# Allegro board SSTM32_BUS_0910.brd
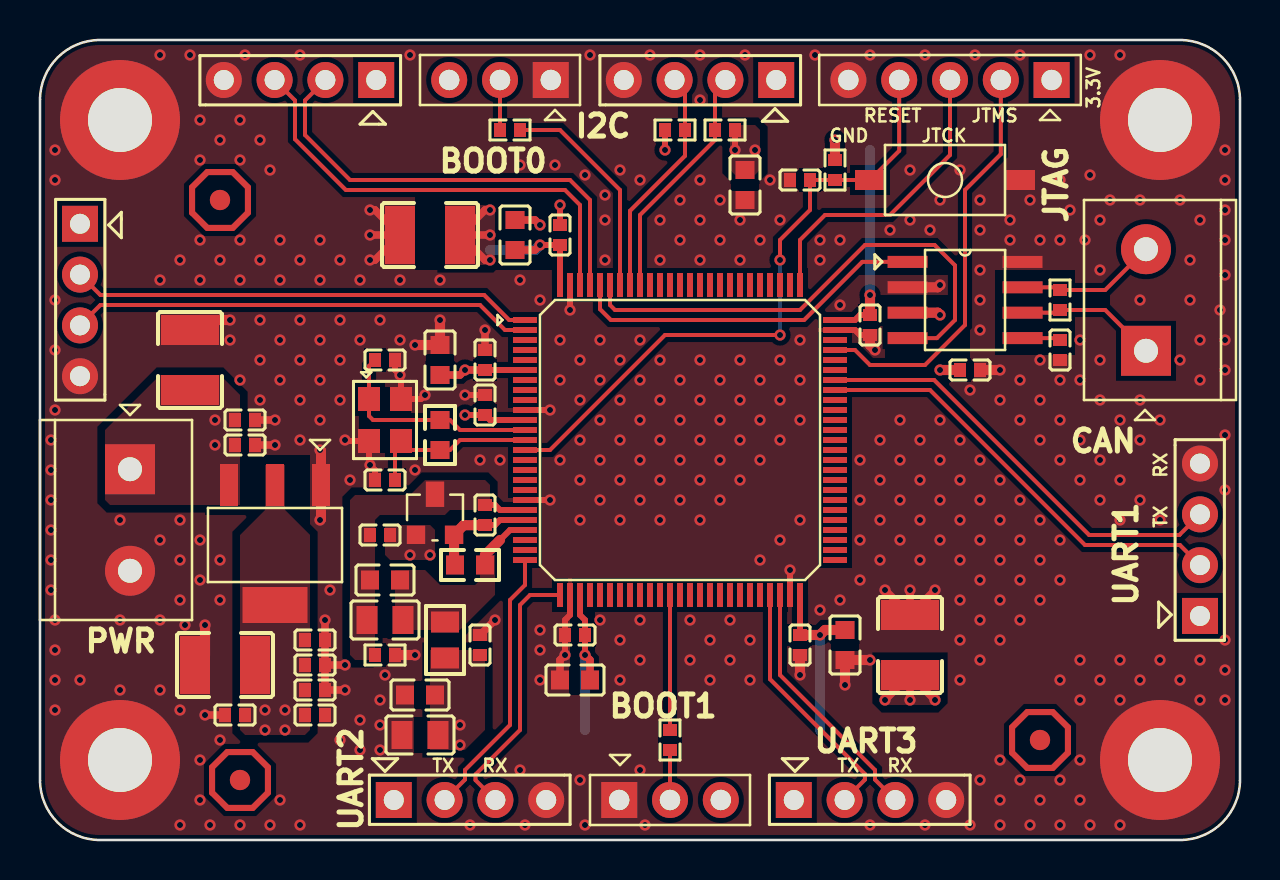
[diagram p0: board, top side]
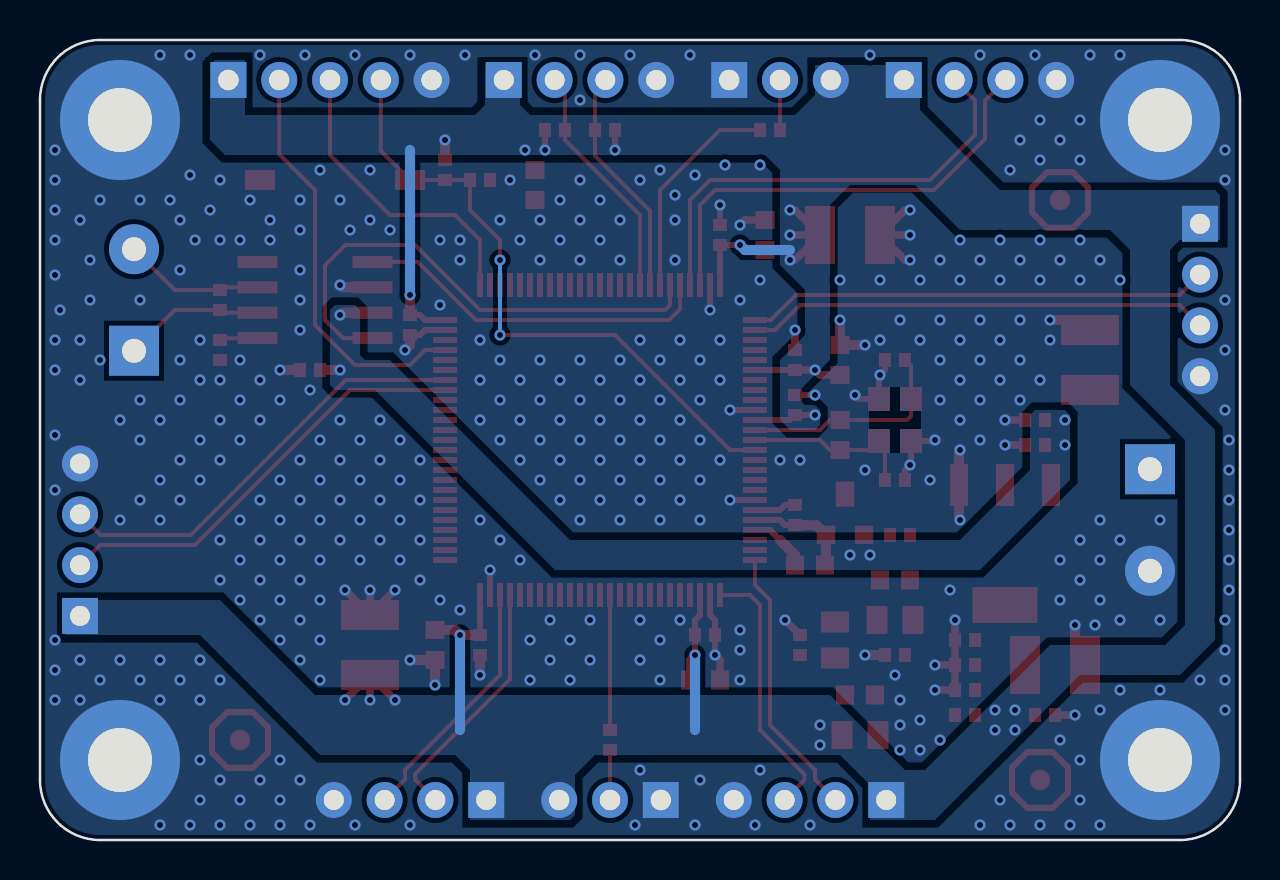
[diagram p1: board, bottom side, seen from below]

Outline 60 x 40 mm; copper layers: TOP, BOTTOM. Coordinates in mm from the lower left corner of the outline.
Outline path: 0,37 arc(0.88,39.12) 3,40 57,40 arc(59.12,39.12) 60,37 60,3 arc(59.12,0.88) 57,0 3,0 arc(0.88,0.88) 0,3 0,37

## Placement (name value [footprint] x y rotation side)
C1  20pF  [C0402]  17.25 24 0 top
C2  20pF  [C0402]  17.25 18 0 top
C10  104  [C0402]  17 15.25 0 top
C11  104  [C0402]  22.25 16.25 270 top
C12  104  [C0402]  10.25 21 0 top
C13  104  [C0402]  10.25 19.75 0 top
C14  47uF/16V  [C1210]  7.5 24 90 top
C15  104  [C0402]  13.75 10 180 top
C16  104  [C0402]  13.75 8.75 180 top
C17  104  [C0402]  13.75 7.5 180 top
C18  104  [C0402]  13.75 6.25 180 top
C19  104  [C0402]  9.75 6.25 0 top
C20  47uF/16V  [C1210]  9.25 8.75 180 top
C28  104  [C0402]  22.25 24 270 top
C29  104  [C0402]  26.75 10.25 0 top
C30  104  [C0402]  22 9.75 270 top
C31  104  [C0402]  22.25 21.75 270 top
C32  104  [C0402]  26 30.25 270 top
C33  104  [C0402]  38 9.75 90 top
C34  104  [C0402]  41.5 25.75 90 top
C35  47uF/25V  [C1210]  43.5 9.75 90 top
C36  47uF/25V  [C1210]  19.5 30.25 180 top
C46  0.1uF  [C0603]  26.75 8 0 top
C47  0.1uF  [C0603]  40.25 9.75 90 top
C48  0.1uF  [C0603]  19 7.25 0 top
C49  0.1uF  [C0603]  35.25 32.75 90 top
C50  0.1uF  [C0603]  20 24 270 top
C51  0.1uF  [C0603]  23.75 30.25 270 top
C52  10uF/25V  [C0805]  19 5.25 180 top
C53  0.1uF  [C0603]  17.25 13 0 top
C54  10uF/25V  [C0805]  17.25 11 180 top
C55  0.1uF  [C0402]  51 24.5 270 top
C56  0.1uF  [C0402]  46.5 23.5 0 top
C57  0.1uF  [C0402]  38 33 180 top
J1  Header_2p54  [CON4M2_54H11D]  2 27 270 top
J2  Header_2p54  [CON1X3_2P54]  23 38 180 top
J3  Header_2p54  [CON1X3_2P54]  31.5 2 0 top
J4  Header_2p54  [CON4M2_54H11D]  13 38 180 top
J5  HEADER 2  [CON1X2_5P08]  55.3 27 90 top
J6  HEADER 5/SM  [CON1X5_2P54]  45.5 38 180 top
J7  Header_2p54  [CON4M2_54H11D]  21.5 2 0 top
J8  Header_2p54  [CON4M2_54H11D]  58 15.01 90 top
J9  Header_2p54  [CON4M2_54H11D]  41.5 2 0 top
J10  Header_2p54  [CON4M2_54H11D]  33 38 180 top
J11  HEADER 2  [CON1X2_5P08]  4.5 16 270 top
K1  OMRON-B3U-1000P  [TS-LB16]  45.25 33 0 top
L2  10uH  [L0805]  20.25 10 90 top
M1  MountHole_3r20x6r00  [MOUNT06R00D03R20]  4 4 0 top
M2  MountHole_3r20x6r00  [MOUNT06R00D03R20]  56 4 0 top
M3  MountHole_3r20x6r00  [MOUNT06R00D03R20]  56 36 0 top
M4  MountHole_3r20x6r00  [MOUNT06R00D03R20]  4 36 0 top
NOREF  -  [unnamed]  9 32 0 top
NOREF#2  -  [unnamed]  10 3 0 top
NOREF#3  -  [unnamed]  50 5 0 top
R2  1M  [R0603]  20 20.25 270 top
R3  10K  [R0402]  39.75 33.5 270 top
R23  NC  [R0603]  21.5 13.75 180 top
R24  0  [R0402]  17.25 9.25 180 top
R25  10K  [R0402]  23.5 35.5 0 top
R26  10K  [R0402]  31.5 5 90 top
R27  4.7K  [R0402]  34.25 35.5 0 top
R28  4.7K  [R0402]  31.75 35.5 180 top
R29  120R  [R0402]  51 27 270 top
U1  stm32f103vct6  [ST_LQFP100_S]  32 20 0 top
U7  REF3020  [SOT23]  19.75 16.25 0 top
U8  LT1117-3.3  [SOT-223]  11.75 14.75 0 top
U12  TJA1050T  [PLS_SOP-8_S]  46.25 27 270 top
Y2  8.000MHz  [CRYS4_3225_S]  17.25 21 270 top

## Library data of the parts
C1 C2 C10 C11 C28-C34 C46-C51 C53 C55-C57 = CAP NP
C12 C13 C15-C19 = C0603
C14 C20 C35 C36 C52 C54 = TC5\2MM
J1 J4 J7-J10 = CON_1x4
J2 J3 = HEADER_3x1
J5 J11 = HEADER 2
J6 = HEADER 5/SM
K1 = SW_DP_MOM_0
L2 = CHOKE
M1-M4 = MountHole
R2 R3 R23-R29 = R
U1 = stm32f103vct6
U7 = AS1117_3
U8 = AS1117_0
U12 = BA6305F/SO_3
Y2 = Crystal_4pin

## Footprints (pads in the part's own frame, mm; a bottom-side part is the same pattern mirrored in y, then rotated)
C0402
  rect 0.6x0.7 smd: 1(-0.5,0) 2(0.5,0)
C0603
  rect 0.9x0.95 smd: 1(-0.75,0) 2(0.75,0)
C0805
  rect 1.05x1.4 smd: 1(-0.9,0) 2(0.9,0)
C1210
  rect 1.5x2.9 smd: 1(-1.5,0) 2(1.5,0)
CON1X2_5P08
  rect 2.5x2.5 hole 1.2: 1(-2.54,0)
  round 2.5 hole 1.2: 2(2.54,0)
CON1X3_2P54
  rect 1.8x1.8 hole 1.02: 1(-2.54,0)
  round 1.8 hole 1.02: 2(0,0) 3(2.54,0)
CON1X5_2P54
  rect 1.8x1.8 hole 1.02: 1(-5.08,0)
  round 1.8 hole 1.02: 2(-2.54,0) 3(0,0) 4(2.54,0) 5(5.08,0)
CON4M2_54H11D
  rect 1.8x1.8 hole 1: 1(-3.81,0)
  round 1.8 hole 1: 2(-1.27,0) 3(1.27,0) 4(3.81,0)
CRYS4_3225_S
  rect 1.2x1.1 smd: 1(-1.05,-0.8) 2(1.05,-0.8) 3(1.05,0.8) 4(-1.05,0.8)
L0805
  rect 1.05x1.4 smd: 1(-0.9,0) 2(0.9,0)
MOUNT06R00D03R20
  round 6 hole 3.2: 1(0,0)
PLS_SOP-8_S
  rect 0.6x2 smd: 1(-1.905,-2.875) 2(-0.635,-2.875) 3(0.635,-2.875) 4(1.905,-2.875) 5(1.905,2.875) 6(0.635,2.875) 7(-0.635,2.875) 8(-1.905,2.875)
R0402
  rect 0.6x0.7 smd: 1(-0.5,0) 2(0.5,0)
R0603
  rect 0.9x0.95 smd: 1(-0.75,0) 2(0.75,0)
SOT23
  rect 0.92x0.92 smd: 1(-0.953,-0.991) 2(0.953,-0.991)
  rect 0.92x1.27 smd: 3(0,1.041)
SOT-223
  rect 0.9x2.1 smd: 1(2.3,3) 2(0,3) 3(-2.3,3)
  rect 3.25x1.8 smd: 4(0,-3)
ST_LQFP100_S
  rect 1.2x0.3 smd: 1(-7.75,6) 2(-7.75,5.5) 3(-7.75,5) 4(-7.75,4.5) 5(-7.75,4) 6(-7.75,3.5) 7(-7.75,3) 8(-7.75,2.5) 9(-7.75,2) 10(-7.75,1.5) 11(-7.75,1) 12(-7.75,0.5) 13(-7.75,0) 14(-7.75,-0.5) 15(-7.75,-1) 16(-7.75,-1.5) 17(-7.75,-2) 18(-7.75,-2.5) 19(-7.75,-3) 20(-7.75,-3.5) 21(-7.75,-4) 22(-7.75,-4.5) 23(-7.75,-5) 24(-7.75,-5.5) 25(-7.75,-6) 51(7.75,-6) 52(7.75,-5.5) 53(7.75,-5) 54(7.75,-4.5) 55(7.75,-4) 56(7.75,-3.5) 57(7.75,-3) 58(7.75,-2.5) 59(7.75,-2) 60(7.75,-1.5) 61(7.75,-1) 62(7.75,-0.5) 63(7.75,0) 64(7.75,0.5) 65(7.75,1) 66(7.75,1.5) 67(7.75,2) 68(7.75,2.5) 69(7.75,3) 70(7.75,3.5) 71(7.75,4) 72(7.75,4.5) 73(7.75,5) 74(7.75,5.5) 75(7.75,6)
  rect 0.3x1.2 smd: 26(-6,-7.75) 27(-5.5,-7.75) 28(-5,-7.75) 29(-4.5,-7.75) 30(-4,-7.75) 31(-3.5,-7.75) 32(-3,-7.75) 33(-2.5,-7.75) 34(-2,-7.75) 35(-1.5,-7.75) 36(-1,-7.75) 37(-0.5,-7.75) 38(0,-7.75) 39(0.5,-7.75) 40(1,-7.75) 41(1.5,-7.75) 42(2,-7.75) 43(2.5,-7.75) 44(3,-7.75) 45(3.5,-7.75) 46(4,-7.75) 47(4.5,-7.75) 48(5,-7.75) 49(5.5,-7.75) 50(6,-7.75) 76(6,7.75) 77(5.5,7.75) 78(5,7.75) 79(4.5,7.75) 80(4,7.75) 81(3.5,7.75) 82(3,7.75) 83(2.5,7.75) 84(2,7.75) 85(1.5,7.75) 86(1,7.75) 87(0.5,7.75) 88(0,7.75) 89(-0.5,7.75) 90(-1,7.75) 91(-1.5,7.75) 92(-2,7.75) 93(-2.5,7.75) 94(-3,7.75) 95(-3.5,7.75) 96(-4,7.75) 97(-4.5,7.75) 98(-5,7.75) 99(-5.5,7.75) 100(-6,7.75)
TS-LB16
  rect 1.5x1 smd: 1(-3.75,0) 2(3.75,0)
unnamed
  round 1.016 smd: 1(0,0)

## Nets
GND: C1.2 C2.1 C12.2 C13.2 C14.2 C15.1 C16.1 C17.1 C18.1 C19.1 C20.2 C28.1 C29.1 C30.1 C31.1 C32.1 C33.1 C34.1 C35.2 C36.2 C46.1 C47.1 C48.1 C49.1 C50.1 C51.1 C52.2 C55.2 C56.2 C57.2 J1.4 J2.1 J3.1 J4.4 J6.5 J7.4 J8.4 J9.4 J10.4 J11.2 K1.2(A2) M1.1 M2.1 M3.1 M4.1 R24.1 U1.10(VSS_5) U1.19(VSSA) U1.27(VSS_4) U1.49(VSS_1) U1.74(VSS_2) U1.99(VSS_3) U8.1(ADJ/GND) U12.2(GND) U12.8(S) Y2.2(GND#2) Y2.4(GND#4)
VCC3V3: C15.2 C16.2 C17.2 C18.2 C19.2 C20.1 C28.2 C29.2 C30.2 C31.2 C32.2 C33.2 C34.2 C35.1 C36.1 C46.2 C47.2 C48.2 C49.2 C50.2 C51.2 C52.1 J1.1 J2.3 J3.3 J4.1 J6.1 J7.1 J8.1 J9.1 J10.1 L2.1 R3.1 R27.2 R28.2 U1.6(VBAT) U1.11(VDD_5) U1.28(VDD_4) U1.50(VDD_1) U1.75(VDD_2) U1.100(VDD_3) U8.2(VOUT) U8.4(OUT)
VCC5V: C10.2 C12.1 C13.1 C14.1 C56.1 J11.1 U7.1(VIN) U8.3(VIN) U12.3(VCC)
VDDA: C53.2 C54.1 L2.2 R23.1 U1.22(VDDA)
BOOT0: R25.2 U1.94(BOOT0)
BOOT1: R26.2 U1.37(PB2/BOOT2)
CAN_RX: U1.95(PB8) U12.4(RXD)
CAN_TX: U1.96(PB9) U12.1(TXD)
I2C_SCL: J10.2 R27.1 U1.92(PB6)
I2C_SDA: J10.3 R28.1 U1.93(PB7)
JTCK: J6.3 U1.76(PA14)
JTMS: J6.2 U1.72(PA13)
OSC_IN: C1.1 R2.1 U1.12(OSC_IN) Y2.1(XTAL1)
OSC_OUT: C2.2 R2.2 U1.13(OSC_OUT) Y2.3(XTAL2)
PE0: J4.2 U1.97(PE0)
PE1: J4.3 U1.98(PE1)
PE2: J1.2 U1.1(PE2)
PE3: J1.3 U1.2(PE3)
RESET_N: C57.1 J6.4 K1.1(A1) R3.2 U1.14(NRST)
UART_RX1: J8.3 U1.69(PA10)
UART_RX2: J7.3 U1.26(PA3)
UART_RX3: J9.3 U1.48(PB11)
UART_TX1: J8.2 U1.68(PA9)
UART_TX2: J7.2 U1.25(PA2)
UART_TX3: J9.2 U1.47(PB10)
VREF+: C11.2 R23.2 U1.21(VREF+) U7.2(VREF)
VREF-: C10.1 C11.1 C53.1 C54.2 R24.2 U1.20(VREF-) U7.3(GND)
N16840656: J3.2 R26.1
N16851849: J5.2 R29.1 U12.7(CANH)
N16851852: J5.1 R29.2 U12.6(CANL)
N16852460: C55.1 U12.5(VREF)
N16860628: J2.2 R25.1

Pads without a net: NOREF 1; NOREF#2 1; NOREF#3 1; U1 3 4 5 7 8 9 15 16 17 18 23 24 29 30 31 32 33 34 35 36 38 39 40 41 42 43 44 45 46 51 52 53 54 55 56 57 58 59 60 61 62 63 64 65 66 67 70 71 73 77 78 79 80 81 82 83 84 85 86 87 88 89 90 91

## Via types
v1: diameter 0.559, hole 0.305, TOP to BOTTOM, 437 vias

## Routing (per net, layer and track width the routed paths; a pad name or vN(x,y) marks a point on that pad's centre or on a via; arc(x,y) is an arc through that point)
GND: length 60.7
  TOP w0.3: C2.1 16.75,18.5 v1(16.5,18.75) 16.45,18.8 Y2.2 15.3,19.95 v1(15.25,20) ; v1(26.25,9.25) C29.1 26.25,11 26.5,11.25 U1.27 ; U1.19 v1(25.5,17) ; U1.74 40.75,25.5 41,25.25 C34.1 ; U1.49 v1(37.5,13.5) ; U1.10 v1(25.5,21.5) ; C32.1 v1(26,31.75) ; U1.99 v1(26.5,26.5) ; v1(19.25,22.25) 19.05,22.05 Y2.4 18.05,23.2 v1(18,23.25) 17.75,23.5 C1.2 ; C31.1 v1(21.25,22.25)
  TOP w0.381: v1(42.25,12.5) C35.2 ; C35.2 v1(44.75,12.5) ; C35.2 v1(43.5,12.5) ; C51.1 24.75,31 v1(25,30.75) ; C13.2 v1(11.75,19.75) ; v1(26.25,9.25) 26,9 C46.1 ; C36.2 16.75,29 v1(16.5,29) ; C36.2 v1(16.5,30.25) ; C36.2 16.75,31.5 v1(16.5,31.5) ; C12.2 v1(11.75,21) ; C28.1 v1(22.25,25.5) ; v1(14.25,11) C15.1 C16.1 ; C16.1 v1(15.25,8.75) ; C16.1 C17.1 v1(15.25,7.5) ; C30.1 v1(22.75,11) ; C19.1 v1(8.25,6.25)
  TOP w0.5: v1(14,16) 14.05,16.05 U8.1 14.05,19.45 v1(14,19.5)
  TOP w0.508: v1(8.25,10.75) 8.25,9.25 C20.2 ; v1(9.5,26) 8,26 C14.2 ; v1(20,26) C50.1 v1(18.75,24.75) ; C34.1 41.5,24.75 v1(41.75,24.5) ; v1(41.5,9) C47.1 v1(40.25,7.75) ; U12.2 44.88,27.64 v1(45,27.75) ; R24.1 v1(18.75,9.25) ; C33.1 v1(38,8.25) ; C56.2 v1(48,23.5)
  vias: v1(0.55,20) v1(0.55,18.5) v1(0.55,17) v1(0.55,15.5) v1(0.55,14) v1(0.55,12.5) v1(0.75,34.5) v1(0.75,33) v1(0.75,27) v1(0.75,24.5) v1(0.75,21.5) v1(0.75,11) v1(0.75,9.5) v1(0.75,8) v1(0.75,6.5) v1(2,8) v1(4,16) v1(4,11) v1(4,7.5) v1(6,39.25) v1(6,28) v1(6,15) v1(6,11) v1(6,7.5) v1(7,29) v1(7,16) v1(7,14) v1(7,12) v1(7,6.5) v1(7,0.75) v1(7.25,10.75) v1(7.5,39.25) v1(8,36) v1(8,34) v1(8,30) v1(8,28) v1(8,15) v1(8,13) v1(8,4) v1(8,2) v1(8.5,0.75) v1(9,35) v1(9,29) v1(9,14) v1(9,12) v1(9,5) v1(9.5,25) v1(10,36) v1(10,34) v1(10,30) v1(10,28) v1(10,23) v1(10,0.75) v1(10.25,39.25) v1(11,35) v1(11,29) v1(11,26) v1(11,24) v1(11,22) v1(11.5,33.5) v1(11.5,0.75) v1(12,30) v1(12,28) v1(12,25) v1(12,23) v1(12,2) v1(13,39.25) v1(13,29) v1(13,26) v1(13,24) v1(13,22) v1(13,20) v1(13,0.75) v1(14,30) v1(14,28) v1(14,25) v1(14,23) v1(14,21) v1(14.5,12.5) v1(15,29) v1(15,26) v1(15,24) v1(15,22) v1(15,5) v1(15.5,18) v1(16,28) v1(16,25) v1(16,6) v1(16,4.5) v1(17,26) v1(17,7) v1(17,5.75) v1(17,4.5) v1(17.25,8.25) v1(18,28) v1(18,25) v1(18.5,39.25) v1(18.75,18.5) v1(20,28) v1(21.5,0.75) v1(22,19) v1(23,19) v1(24,33.75) v1(24,28) v1(24,3.5) v1(24.25,0.75) v1(25,27) v1(25,10.5) v1(25,9.5) v1(25,8) v1(25.75,33.75) v1(26,25) v1(26,23) v1(26,19) v1(27,24) v1(27,22) v1(27,20) v1(27,18) v1(27,16) v1(27,3) v1(27.25,33.25) v1(27.25,0.75) v1(27.5,39.25) v1(28,25) v1(28,23) v1(28,21) v1(28,19) v1(28,17) v1(28,11) v1(28.25,32.25) v1(28.25,31) v1(28.25,29) v1(29,33.5) v1(29,24) v1(29,22) v1(29,20) v1(29,18) v1(29,16) v1(29,10) v1(29,8) v1(30,33) v1(30,25) v1(30,23) v1(30,21) v1(30,19) v1(30,17) v1(30,11) v1(30,9) v1(30,3.5) v1(30.25,0.75) v1(30.5,39.25) v1(31,31) v1(31,29) v1(31,24) v1(31,22) v1(31,20) v1(31,18) v1(31,16) v1(32,32) v1(32,30) v1(32,23) v1(32,21) v1(32,19) v1(32,17) v1(32.5,11) v1(32.5,9) v1(33,39.25) v1(33,37) v1(33,33) v1(33,31) v1(33,29) v1(33,24) v1(33,22) v1(33,20) v1(33,18) v1(33,16) v1(33.5,10) v1(33.5,8) v1(34,32) v1(34,30) v1(34,23) v1(34,21) v1(34,19) v1(34,17) v1(34.5,11) v1(34.5,9) v1(35,31) v1(35,29) v1(35,24) v1(35,22) v1(35,20) v1(35,18) v1(35.25,39.25) v1(35.5,10) v1(35.5,8) v1(36,30) v1(36,23) v1(36,21) v1(36,19) v1(36,14) v1(36.5,33) v1(37,31) v1(37,24) v1(37,22) v1(37,20) v1(37,15) v1(38,25) v1(38,23) v1(38,21) v1(38,16) v1(38.75,39.25) v1(39,30) v1(39,29) v1(39,11.5) v1(40,30) v1(40,26.75) v1(40,12) v1(41,19) v1(41,17) v1(41,15) v1(41,13) v1(41.5,39.25) v1(41.5,0.75) v1(42,20) v1(42,18) v1(42,16) v1(42,14) v1(42.5,30.5) v1(43,21) v1(43,19) v1(43,17) v1(43,15) v1(43.5,33.5) v1(43.5,31) v1(44,20) v1(44,18) v1(44,16) v1(44,14) v1(44.25,39.25) v1(44.25,0.75) v1(44.5,30.5) v1(45,32) v1(45,21) v1(45,19) v1(45,17) v1(45,15) v1(46,33.5) v1(46,20) v1(46,18) v1(46,16) v1(46,14) v1(46,12) v1(46,10) v1(46,8) v1(46.5,22.5) v1(46.5,0.75) v1(46.75,39.25) v1(47,32) v1(47,30.5) v1(47,28.5) v1(47,27) v1(47,25.5) v1(47,19) v1(47,17) v1(47,15) v1(47,13) v1(47,11) v1(47,9) v1(47,3) v1(48,22) v1(48,18) v1(48,16) v1(48,14) v1(48,12) v1(48,10) v1(48,4) v1(48,2) v1(48,0.75) v1(48.5,31) v1(48.5,30) v1(49,39.25) v1(49,23) v1(49,21) v1(49,17) v1(49,15) v1(49,13) v1(49,11) v1(49,3) v1(49.5,32) v1(49.5,0.75) v1(50,30) v1(50,24) v1(50,22) v1(50,20) v1(50,16) v1(50,14) v1(50,12) v1(50,2) v1(51,33) v1(51,30) v1(51,23) v1(51,21) v1(51,19) v1(51,15) v1(51,13) v1(51,8) v1(51,3) v1(51,0.75) v1(51.5,31.5) v1(52,25) v1(52,23) v1(52,20) v1(52,18) v1(52,9) v1(52,7) v1(52,4) v1(52,2) v1(52.25,30) v1(52.5,39.25) v1(52.5,33.25) v1(52.5,0.75) v1(53,31) v1(53,28.5) v1(53,24) v1(53,22) v1(53,19) v1(53,17) v1(53,8) v1(53.5,32) v1(54,39.25) v1(54,21) v1(54,18) v1(54,16) v1(54,9) v1(54,7) v1(54,0.75) v1(55,32) v1(55,27) v1(55,22) v1(55,20) v1(55,17) v1(55,8) v1(56,21) v1(56,16) v1(56,9) v1(57,32) v1(57,24) v1(57,8) v1(57.5,29) v1(57.5,27) v1(58,31) v1(58,25) v1(58,23) v1(58,9) v1(58,7) v1(59,26.5) v1(59.25,34.5) v1(59.25,33) v1(59.25,31.5) v1(59.25,30) v1(59.25,28.25) v1(59.25,25) v1(59.25,23.5) v1(59.25,20.25) v1(59.25,17.5) v1(59.25,10) v1(59.25,8.5) v1(59.25,7)
VCC3V3: length 55.1
  TOP w0.3: U1.6 C28.2 ; C33.2 U1.50 ; v1(21.25,21.25) C31.2 22.5,21 U1.11 ; R28.2 v1(31.25,34.5) ; U1.75 40.75,26 41,26.25 C34.2 ; U1.28 27,11.25 27.25,11 C29.2 v1(27.25,9.25) ; v1(25,29.75) C32.2 U1.100 ; R27.2 v1(34.75,34.5)
  TOP w0.381: v1(44.75,7) C35.1 ; C35.1 v1(42.25,7) ; C35.1 v1(43.5,7) ; v1(22.5,29) 22.25,29 C36.1 ; C46.2 27.5,9 v1(27.25,9.25) ; C36.1 22.25,31.5 v1(22.5,31.5) ; C36.1 v1(22.5,30.25) ; C50.2 21,23.25 v1(21.25,23.5) C28.2 ; v1(25,29.75) 24.75,29.5 C51.2
  TOP w0.508: C34.2 v1(41.5,27.25) ; C33.2 v1(39,10.25) 39.25,10.5 C47.2 ; R3.1 v1(39.75,35)
  BOTTOM w0.508: 27.25,5.5 v1(27.25,9.25) ; v1(39,10.25) 39,5.5 ; v1(25,29.75) 24.75,29.5 22.5,29.5 ; v1(41.5,27.25) 41.5,34.5
  vias: v1(11.25,6.5) v1(11.25,5.5) v1(12.25,6.5) v1(12.25,5.5) v1(21,5.75) v1(21,4.75) v1(35.75,34.5)
VCC5V: length 2.7
  TOP w0.508: C56.1 v1(45,23.5) ; U12.3 44.88,26.36 v1(45,26.25)
  vias: v1(8.75,21) v1(8.75,19.75) v1(18.5,14.25) v1(19.5,14.25)
VDDA: length 3
  TOP w0.3: 23,15 23.5,15.5 U1.22
  TOP w0.508: R23.1 22.25,14.25 23,15
BOOT0: length 11
  TOP w0.2: U1.94 29,32.5 26,35.5 R25.2
BOOT1: length 6.8
  TOP w0.2: U1.37 R26.2
CAN_RX: length 25.6
  TOP w0.2: U12.4 44.85,25.09 45.75,26 45.75,28.73 44.73,29.75 41.25,29.75 38,26.5 28.75,26.5 28.5,26.75 U1.95
CAN_TX: length 18
  TOP w0.2: U1.96 28,26.54 28.54,26 38.21,26 41.11,28.91 U12.1
I2C_SCL: length 12
  TOP w0.2: J10.2 33.75,37.48 R27.1 33.75,35 30,31.25 U1.92
I2C_SDA: length 11.6
  TOP w0.2: U1.93 29.5,31.46 32.25,34.21 R28.1 32.25,37.48 J10.3
JTCK: length 15.3
  TOP w0.2: U1.76 38,30 39.25,31.25 42.5,31.25 45.5,34.25 J6.3
JTMS: length 20.6
  TOP w0.2: U1.72 40.75,24.5 41.5,23.75 44.25,23.75 46.25,25.75 46.25,32.5 48.04,34.29 J6.2
OSC_IN: length 11
  TOP w0.2: U1.12 21,20.5 20.5,21 R2.1 16.65,21 16.45,21.2 Y2.1 16.45,23.7 C1.1
OSC_OUT: length 8.7
  TOP w0.2: C2.2 17.75,19.65 Y2.3 18.5,19.5 R2.2 20.5,19.5 21,20 U1.13
PE0: length 23
  TOP w0.2: U1.97 27.5,32 26.5,33 15.5,33 13.25,35.25 13.25,36.98 J4.2
PE1: length 23
  TOP w0.2: J4.3 12.75,36.98 12.75,35.04 15.29,32.5 26.25,32.5 27,31.75 U1.98
PE2: length 23.2
  TOP w0.2: U1.1 23.46,26 22.21,27.25 3.02,27.25 J1.2
PE3: length 23.2
  TOP w0.2: U1.2 23.25,25.5 22,26.75 3.02,26.75 J1.3
RESET_N: length 32.1
  TOP w0.2: v1(37,29) 37,30 38.5,31.5 C57.1 R3.2 K1.1 42.96,34.46 J6.4 ; U1.14 25.5,19.5 31.25,25.25 v1(37,25.25)
  BOTTOM w0.2: v1(37,25.25) v1(37,29)
UART_RX1: length 21.9
  TOP w0.2: J8.3 56.97,15.25 52.46,15.25 44.71,23 U1.69
UART_RX2: length 13.3
  TOP w0.2: U1.26 24.5,12.25 24,11.75 24,5.5 21.78,3.28 21.78,2.99 J7.3
UART_RX3: length 12.6
  TOP w0.2: U1.48 37,8.25 41.75,3.5 41.75,3.02 J9.3
UART_TX1: length 21.9
  TOP w0.2: J8.2 56.99,14.75 52.25,14.75 44.5,22.5 U1.68
UART_TX2: length 13.7
  TOP w0.2: J7.2 21.25,3.02 21.25,3.5 23.5,5.75 23.5,12 24.25,12.75 U1.25
UART_TX3: length 12.6
  TOP w0.2: J9.2 41.24,3.01 41.24,3.3 36.5,8.04 U1.47
VREF+: length 5.4
  TOP w0.3: U1.21 23,16 22.75,15.75 C11.2
  TOP w0.508: C11.2 21.77,15.75 21.76,15.74 21.18,15.74 U7.2 20.7,13.8 R23.2
VREF-: length 2.1
  TOP w0.3: U1.20 23,16.5 22.75,16.75 C11.1
N16840656: length 2.5
  TOP w0.2: J3.2 R26.1
N16851849: length 7.1
  TOP w0.2: J5.2 53.26,27.5 R29.1 50.87,27.64 U12.7
N16851852: length 7.1
  TOP w0.2: U12.6 50.87,26.36 R29.2 53.26,26.5 J5.1
N16852460: length 2.2
  TOP w0.2: 48.88,25.09 U12.5 50.91,25.09 C55.1
N16860628: length 2.5
  TOP w0.2: J2.2 R25.1

## Copper pours and planes (outline as drawn; the poured copper is in the pictures)
GND on TOP: 59.75,3 58.94,1.06 57,0.25 3,0.25 1.06,1.06 0.25,3 0.25,37 1.06,38.94 3,39.75 57,39.75 58.94,38.94 59.75,37 ; 12 cut-outs
GND on TOP: 18.25,8.5 15.25,8.5 14,7.25 14,5.75 15.5,4.25 18.25,4.25 18.5,4.5 18.5,8.25
GND on BOTTOM: 59.75,3 58.94,1.06 57,0.25 3,0.25 1.06,1.06 0.25,3 0.25,37 1.06,38.94 3,39.75 57,39.75 58.94,38.94 59.75,37
VCC3V3 on TOP: 42,9 42,7 42.25,6.75 44.75,6.75 45,7 45,9
VCC3V3 on TOP: 19.5,9.5 19.5,4.5 21.25,4.5 22.25,5.5 22.25,9.5
VCC3V3 on TOP: 10,5.5 10.25,5.25 13.25,5.25 13.5,5.5 13.5,15.25 12.25,16.5 12.25,18.75 11.25,18.75 11.25,16.5 10,15.25
VCC3V3 on TOP: 20.25,31.75 22.5,31.75 22.75,31.5 22.75,29 22.5,28.75 20.25,28.75
VCC3V3 on TOP: 34.5,33.5 34.5,35.75 35.75,35.75 36,35.5 36,33.5 35.75,33.25 34.75,33.25
VCC3V3 on BOTTOM: 15.25,1 8,8.25 3,8.25 1.25,10 1.25,20.5 3.5,22.75 3.5,29.5 3,30 1,30 1,32.25 1.25,32.5 12,32.5 16,36.5 16,38.75 21.25,38.75 21.25,37.25 22.25,36.25 35.5,36.25 36,36.75 36,38.75 37.75,38.75 37.75,36.75 38.25,36.25 49.75,36.25 49.75,39 51.25,39 51.5,38.75 51.5,35 50.75,34.25 23.75,34.25 23,33.5 23,28.75 21.75,27.5 21.75,25.25 23,24 23,21 22.5,20.5 21.25,20.5 21,20.75 21,21.5 21.25,21.75 21.75,21.75 22,22 22,22.5 20.5,24 20.5,31.75 19.5,32.75 16.25,32.75 14,30.5 6.5,30.5 5.5,29.5 5.5,22.75 2.75,20 2.75,10.75 3.75,9.75 9.5,9.75 15.75,3.5 16.75,3.5 20.5,7.25 46.25,7.25 51,12 58.75,12 58.75,10.25 52,10.25 46,4.25 39.25,4.25 38.5,3.5 38.5,1 33.5,1 33.25,1.25 33.25,3.25 32.25,4.25 20,4.25 18.5,2.75 18.5,1
VCC5V on TOP: 10,16.75 10,22.25 9,23.25 6,23.25 3.25,20.5 3.25,17 3.5,16.75
VCC5V on TOP: 17.5,14 17.25,14.25 17.25,15.75 19.5,15.75 19.75,15.5 19.75,14.25 19.5,14
VCC5V on BOTTOM: 10.5,18.5 14,15 33.5,15 42.5,24 43.75,24 44,24.25 44,26.5 44.25,26.75 45.25,26.75 45.5,26.5 45.5,22.75 45.25,22.5 43.25,22.5 34.25,13.5 13,13.5 8.5,18 8.5,21.25 8.75,21.5 10.25,21.5 10.5,21.25
VDDA on TOP: 17.75,13.5 17.75,10.5 21,10.5 22.75,12.25 22.75,14.25 22,14.25 22,13 21.75,12.75 20,12.75 19.25,13.5
VREF- on TOP: 22.5,16.5 20.5,16.5 20.25,16.25 17,16.25 16.75,16 16.75,9.25 16.5,9 15.75,9 15.5,9.25 15.5,17 15.75,17.25 18.5,17.25 19.25,18 22.25,18 22.5,17.75

## Text on the board
Ref Des/Silkscreen Top: TX | RX | GND | RESET | JTCK | JTMS | 3.3V | PWR | BOOT0 | I2C | BOOT1 | UART3 | CAN | UART2 | JTAG | UART1
DEVICE_TYPE_TOP: FIGURE | SIZE | 1.0 | 1.02 | 1.2 | DRILL CHART: drill | ALL UNITS ARE IN MILLIMETERS | PLATED | QTY | 26 | 11 | 2
